# Altium PCB pcb.PcbDoc (part 1 of 2)
Units mil, origin at the board's own origin, x right, y up, seen from the top; angles counter-clockwise.
Board outline 1472.44 x 1500 mil, 2 copper layers (Top Layer, Bottom Layer); 119 components, 90 nets, 409 pads, 148 vias.
Unrouted connection lines stored in the file: 1.
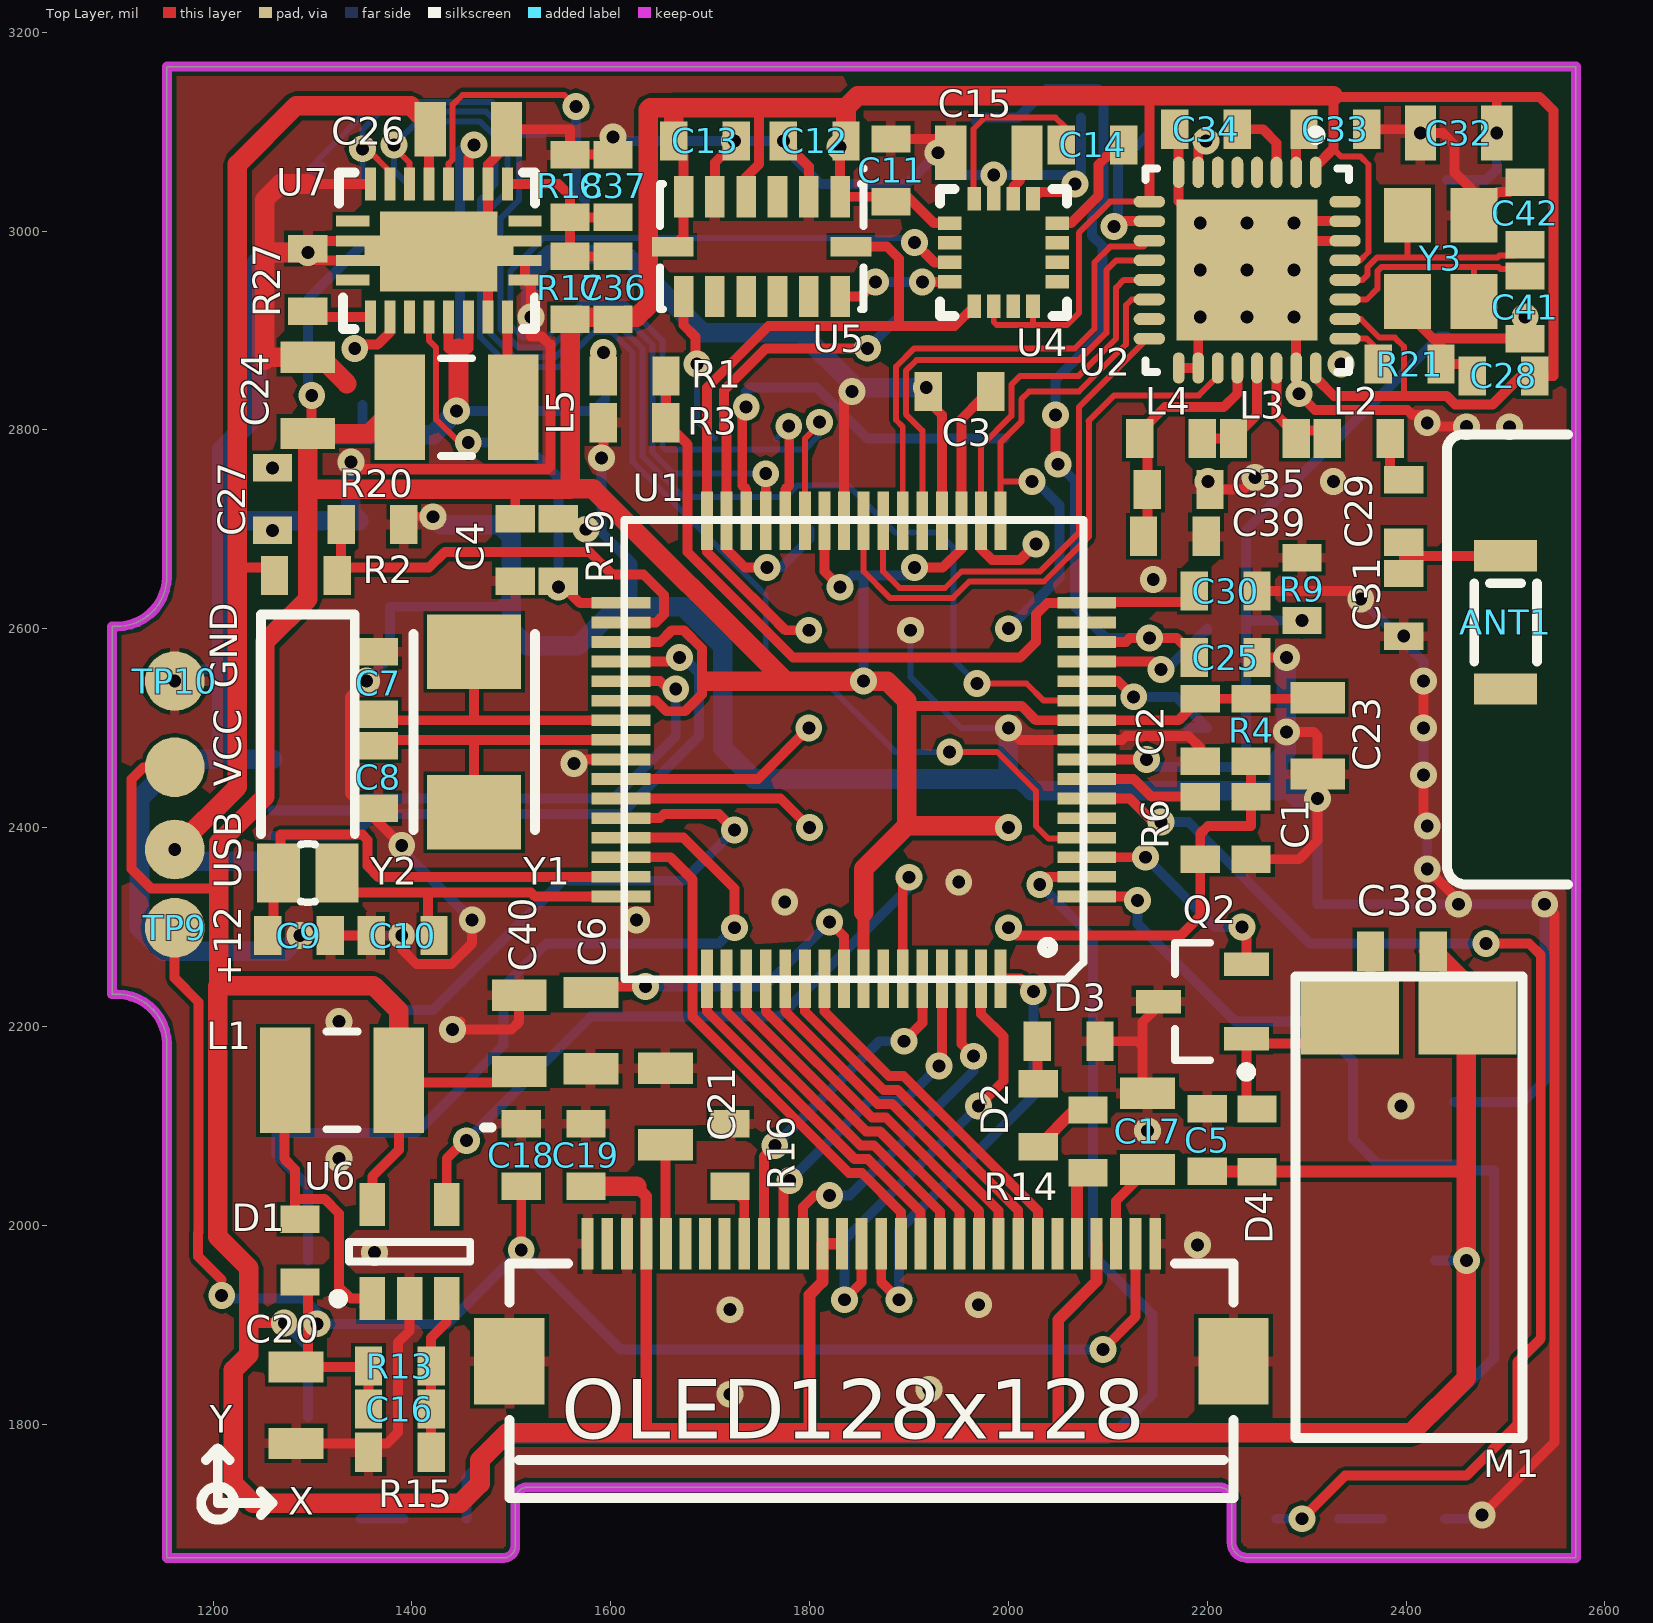
[diagram p0: Top Layer view]
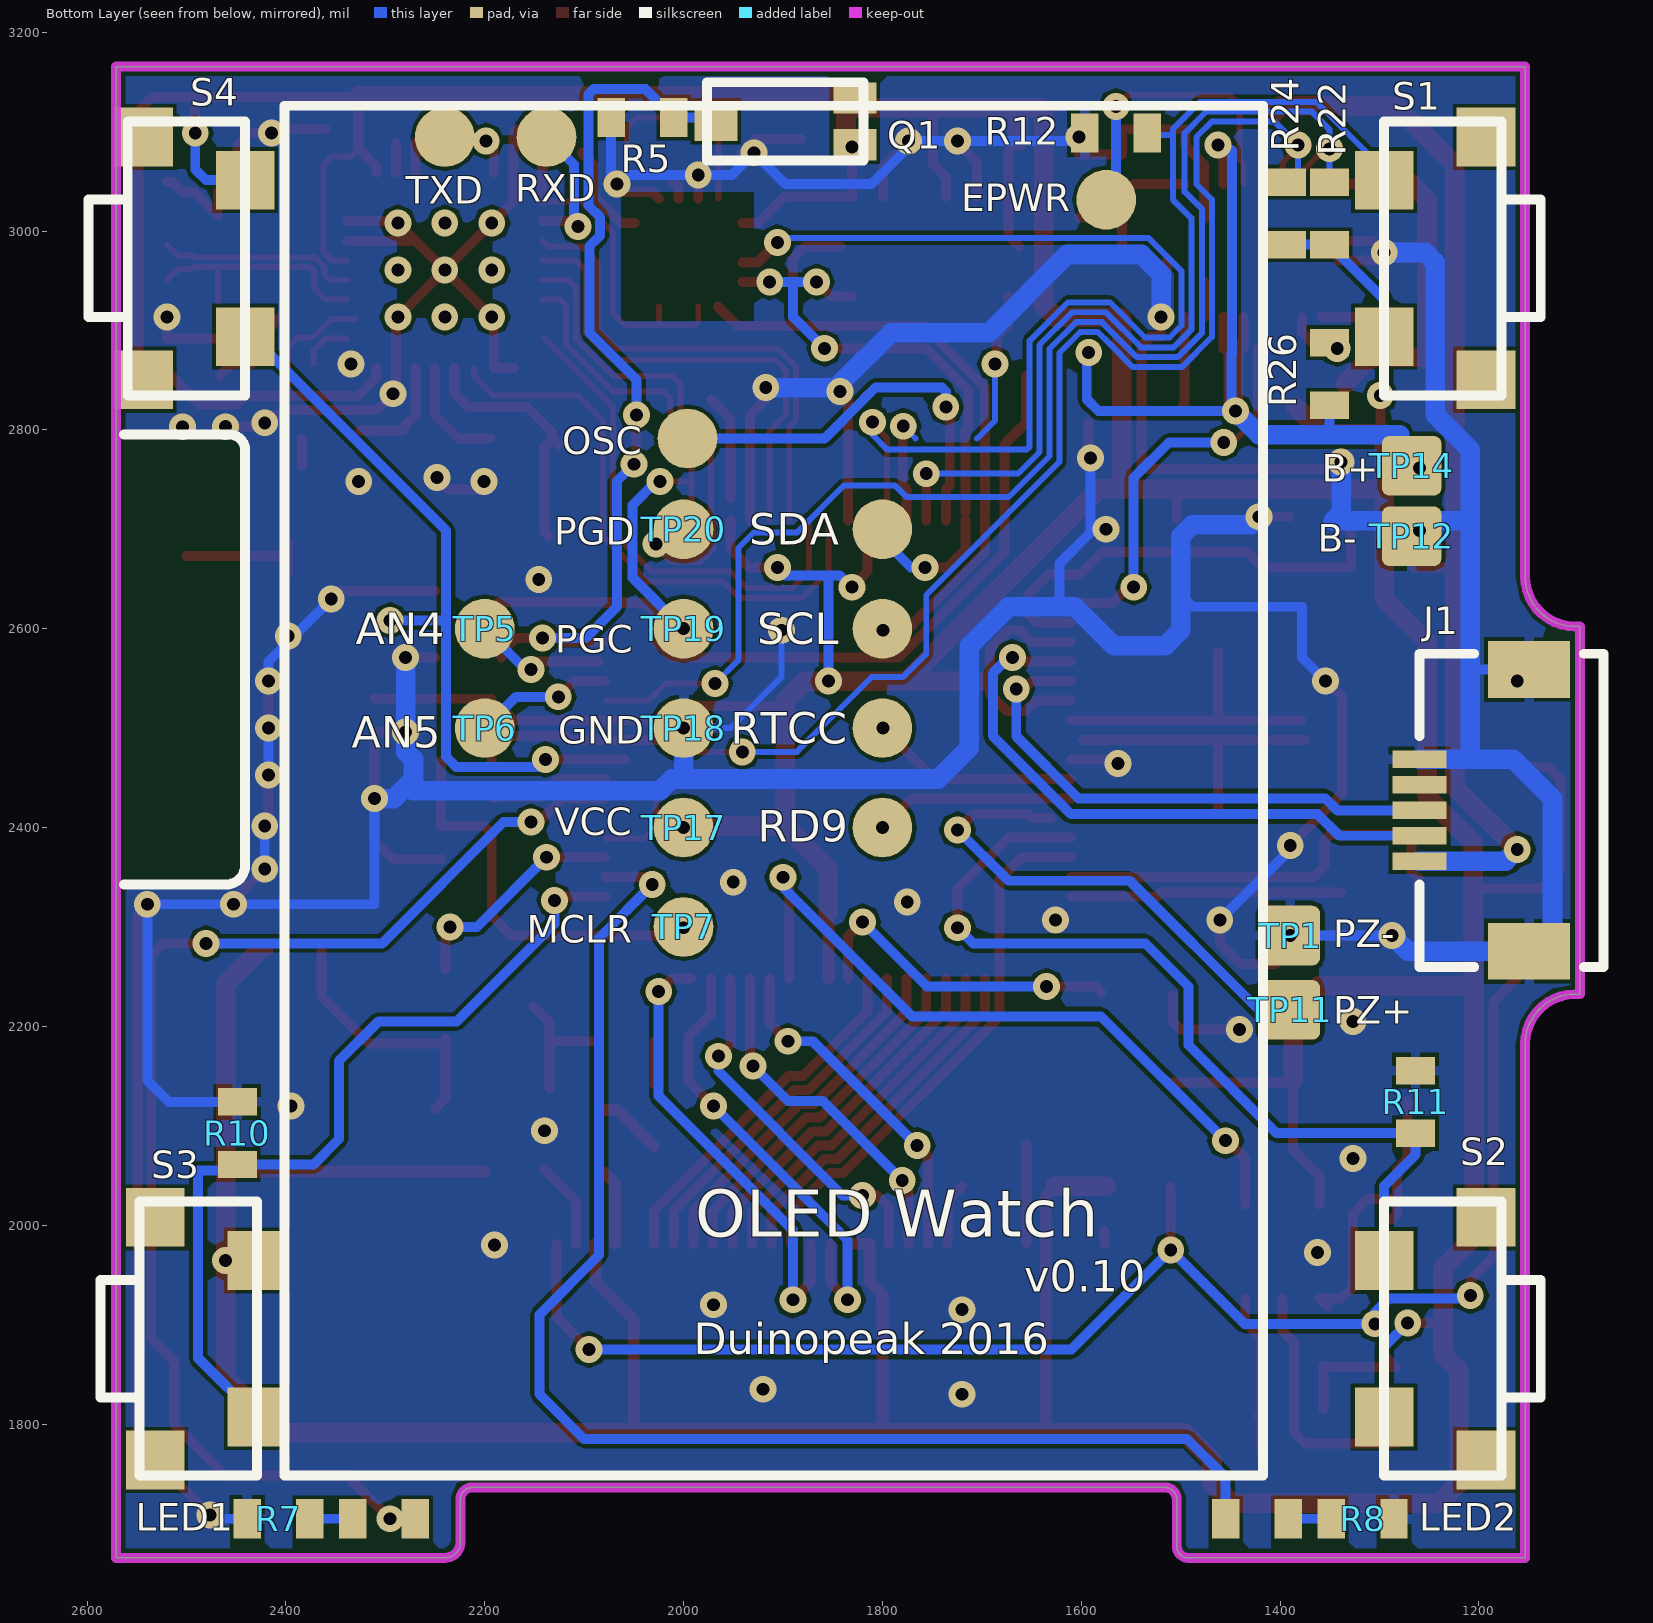
[diagram p1: Bottom Layer view, seen from below]

## Layer stack, top to bottom
Top Layer: signal copper 1.4
Dielectric: dielectric 12.6, FR-4, Dk 4.8
Bottom Layer: signal copper 1.4

## Board outline
2240.16,1665.35 cw(c2240.16,1681.1) 2224.41,1681.1 2224.41,1724.41 ccw(c2212.6,1724.41) 2212.6,1736.22 1515.75,1736.22 ccw(c1515.75,1724.41) 1503.94,1724.41 1503.94,1677.17 cw(c1492.13,1677.17) 1492.13,1665.35 1153.54,1665.35 1153.54,2182.28 ccw(c1103.54,2182.28) 1103.54,2232.28 1098.43,2232.28 1098.43,2602.36 1103.54,2602.36 ccw(c1103.54,2652.36) 1153.54,2652.36 1153.54,3165.35 2570.87,3165.35 2570.87,1665.35

## Design rules (kind name [scope] priority, off if disabled: settings)
Clearance [All] p1: gap=3.94
HoleSize [All] p1: absolutevalues=TRUE maxlimit=100 minlimit=12.99 maxpercent=80.000 minpercent=20.000
MaxMinImpedance [InNet('ANT')] p1: minimum=50.00 maximum=50.00
MinimumAnnularRing [All] p1: minimumring=7
MinimumSolderMaskSliver [All] p1: minsoldermaskwidth=0
NetAntennae ANT_Antennae [InNet('ANT')] p1: netantennaetolerance=3937.01
NetAntennae [All] p2: netantennaetolerance=0
PolygonConnect PolygonConnect_U2 [All vs (ObjectKind = 'Pad') And (Name = 'U2-33')] p1: connectstyle=Direct reliefconductorwidth=10 reliefentries=4 polygonreliefangle="90 Angle" airgapwidth=10
PolygonConnect PolygonConnect_Via [All vs ObjectKind='Via'] p2: connectstyle=Direct reliefconductorwidth=10 reliefentries=4 polygonreliefangle="90 Angle" airgapwidth=10
PolygonConnect [All] p3: connectstyle=Relief reliefconductorwidth=10 reliefentries=4 polygonreliefangle="90 Angle" airgapwidth=10
RoutingVias [All] p1: holewidth=20 width=27.01 viastyle="Through Hole" minholewidth=13 minwidth=27.01 maxholewidth=28 maxwidth=27.01
SilkToSolderMaskClearance SilkscreenOverComponentPads [IsPad] p1: minsilkscreentomaskgap=10 clearancetoexposedcopper=TRUE
SolderMaskExpansion [All] p1: expansion=0.39
Width [All] p1: maxlimit=19.68 minlimit=6 preferedwidth=10
24 further rules are at their usual default settings.

## Classes and differential pairs
component class sensors: 0.7 C11 C12 C13 C14 C15 C25 Q1 R5 U4 U5
component class power: C24 C26 C27 C36 C37 EPWR J1 L5 R17 R18 R19 R22 R24 R26 R27 TP10 TP12 TP14 U7 U8 USB VCC
component class oled: 0.7 C16 C17 C18 C19 C20 C21 C40 D1 D2 D3 L1 OLED128x128 R13 R14 R15 R16 TP9 U6
component class cpu: C1 C2 C3 C4 C5 C6 C7 C8 C9 C10 C23 C30 C38 D4 LED1 LED2 M1 OSC Q2 R1 R2 R3 R4 R6 R7 R8 R9 R10 R11 R12 R20 RD9 RTCC S1 S2 S3 S4 SCL SDA TP1 TP5 TP6 TP7 TP11 TP17 TP18 TP19 TP20 U1 Y1 Y2
component class bluetoothle: ANT1 C28 C29 C31 C32 C33 C34 C35 C39 C41 C42 L2 L3 L4 R21 RXD TXD U2 Y3

## Components (designator, comment, footprint, x,y, rotation, side; value= is the part's Value field where it differs from the comment)
ANT1 "2.4GHz Chip Antenna" 2450AT18A100E 2500,2673.23 r270 top
C1 "Cap" 0603C 2244.09,2425.2 r270 top
C2 "Cap" 0603C 2192.91,2523.62 r270 top
C3 "Cap" 0603C 1976.38,2838.58 r180 top
C4 "Cap" 0603C 1503.94,2704.72 r270 top
C5 "Cap" 0603C 2200,2060 r90 top
C6 "Cap" 0805C 1580,2235 r270 top
C7 "Cap" 0603C 1366.14,2519.68 r90 top
C8 "Cap" 0603C 1366.14,2476.38 r270 top
C9 "Cap" 0603C 1260.83,2291.34 r0 top
C10 "Cap" 0603C 1416.34,2291.34 r180 top
C11 "Cap" 0603C 1881.89,3035.43 r90 top
C12 "Cap" 0603C 1830.71,3090.55 r180 top
C13 "Cap" 0603C 1669.29,3090.55 r0 top
C14 "Cap" 0603C 2059.06,3086.61 r0 top
C15 "Cap Pol1" 0805C 2019.68,3078.74 r180 top
C16 "Cap" 0603C 1362.2,1814.96 r0 top
C17 "Tantalum" 0805C 2140,2055 r90 top
C18 "Cap" 0603C 1510,2045 r90 top
C19 "Cap" 0603C 1575,2045 r90 top
C20 "Cap" 0805C 1283.46,1858.27 r270 top
C21 "Cap" 0805C 1655,2080 r90 top
C23 "Cap" 0805C 2311.02,2531.5 r270 top
C24 "Cap" 0805C 1295.28,2795.28 r90 top
C25 "Cap" 0603C 2192.91,2570.87 r0 top
C26 "Cap" 0805C 1417.32,3102.36 r0 top
C27 "Cap" 0603C 1259.84,2755.91 r270 top
C28 "Cap" 0603C 2472.44,2854.33 r0 top
C29 "Cap" 0603C 2397.64,2744.09 r270 top
C30 "Cap" 0603C 2192.91,2637.8 r0 top
C31 "Cap" 0603C 2397.64,2598.43 r90 top
C32 "Cap" 0805C 2492.13,3098.43 r180 top
C33 "Cap" 0603C 2303.15,3102.36 r0 top
C34 "Cap" 0603C 2224.41,3102.36 r180 top
C35 "Cap" 0603C 2145.67,2740.16 r0 top
C36 "Cap" 0603C 1602.36,2917.32 r90 top
C37 "Cap" 0603C 1602.36,3019.68 r90 top
C38 "Cap" 0603C 2421.26,2275.59 r180 top
C39 "Cap" 0603C 2141.73,2692.91 r0 top
C40 "Cap" 0805C 1507.87,2153.54 r90 top
C41 "Cap" 0603C 2519.68,2897.64 r90 top
C42 "Cap" 0603C 2519.68,2992.13 r90 top
D1 "MBR0520" 0603D 1287.4,2000 r270 top
D2 "1N4148" 0603D 2030,2085 r90 top
D3 "1N4148" 0603D 2035,2185 r0 top
D4 "1N4148" 0603D 2250,2111 r270 top
EPWR "AC" TESTPOINT_TOP#1 1574.8,3031.5 r90 bottom (schematic designator TP3)
J1 "MicroUSB" MICRO_USB 1259.84,2468.5 r180 bottom
L1 "Inductor" INDC3225N 1329.72,2145.67 r180 top
L2 "Inductor" 0603L 2326.77,2791.34 r0 top
L3 "Inductor" 0603L 2232.28,2791.34 r0 top
L4 "Inductor" 0603L 2188.98,2791.34 r180 top
L5 "Inductor" INDC3225N 1444.88,2822.83 r180 top
LED1 "Green" 0603LED 2275.59,1704.72 r0 bottom
LED2 "Blue" 0603LED 1448.82,1704.72 r180 bottom
M1 "Vibration Motor" VIBRATION_MOTOR 2402.75,2258.24 r270 top
OLED128x128 "OLED128x128" OLED128X128 1576.77,1981.3 r0 top
OSC "16MHz" TESTPOINT_TOP#1 1996.06,2791.34 r90 bottom (schematic designator TP2)
Q1 "Photo NPN" TEMT6000 1818.9,3070.87 r0 bottom
Q2 "MOSFET-N" SOT-23B_N 2195,2225 r180 top
R1 "Res3" 0603R 1598.43,2854.33 r0 top
R2 "Res3" 0603R 1318.9,2653.54 r180 top
R3 "Res3" 0603R 1649.61,2807.09 r180 top
R4 "Res3" 0603R 2244.09,2523.62 r270 top
R5 "Res3" 0603R 2015.75,3114.17 r0 bottom
R6 "Res3" 0603R 2192.91,2374.02 r90 top
R7 "Res3" 0603R 2433.07,1704.72 r180 bottom
R8 "Res3" 0603R 1291.34,1704.72 r0 bottom
R9 "Res3" 0603R 2295.28,2614.17 r90 top
R10 "Res3" 0603R 2448.82,2066.93 r90 bottom
R11 "Res3" 0603R 1263.78,2098.43 r90 bottom
R12 "Res3" 0603R 1539.37,3098.43 r0 bottom
R13 "Res3" 0603R 1413.39,1858.27 r180 top
R14 "Res3" 0603R 2080,2110 r270 top
R15 "Res3" 0603R 1362.2,1771.65 r0 top
R16 "Res3" 0603R 1720,2045 r90 top
R17 "Res3" 0603R 1559.06,2917.32 r90 top
R18 "Res3" 0603R 1559.06,3019.69 r90 top
R19 "Res3" 0603R 1547.24,2704.72 r270 top
R20 "Res3" 0603R 1385.83,2704.72 r180 top
R21 "Res3" 0603R 2429.13,2866.14 r180 top
R22 "Res3" 0603R 1350.39,2992.13 r90 bottom
R24 "Res3" 0603R 1393.7,2992.13 r90 bottom
R26 "Res3" 0603R 1350.39,2881.89 r270 bottom
R27 "Res3" 0603R 1295.28,2925.2 r90 top
RD9 "" TESTPOINT_TOP#1 1800,2400 r90 bottom (schematic designator TP2)
RTCC "RTCC" TESTPOINT_TOP#1 1800,2500 r90 bottom (schematic designator TP8)
RXD "AN4" TESTPOINT_TOP#1 2137.8,3094.49 r90 bottom (schematic designator TP4)
S1 "SideButton" SIDE_BUTTON 1295.28,3110.24 r180 bottom
S2 "SideButton" SIDE_BUTTON 1295.28,2023.62 r180 bottom
S3 "SideButton" SIDE_BUTTON 2429.13,1748.03 r0 bottom
S4 "SideButton" SIDE_BUTTON 2440.94,2834.65 r0 bottom
SCL "SCL" TESTPOINT_TOP#1 1800,2600 r90 bottom (schematic designator TP3)
SDA "SDA" TESTPOINT_TOP#1 1800,2700 r90 bottom (schematic designator TP2)
TP1 "PZ-" TESTPOINT_TOP#2 1389.76,2291.33 r180 bottom
TP5 "AN4" TESTPOINT_TOP#1 2200,2600 r90 bottom
TP6 "AN5" TESTPOINT_TOP#1 2200,2500 r90 bottom
TP7 "MCLR" TESTPOINT_TOP#1 2000,2300 r90 bottom
TP9 "+12" TESTPOINT_TOP#1 1161.42,2299.21 r90 top
TP10 "GND" TESTPOINT_TOP#1 1161.42,2547.24 r90 top
TP11 "PZ+" TESTPOINT_TOP#2 1389.76,2216.54 r90 bottom
TP12 "B-" TESTPOINT_TOP#2 1267.72,2692.91 r90 bottom
TP14 "B+" TESTPOINT_TOP#2 1267.72,2763.78 r90 bottom
TP17 "VCC" TESTPOINT_TOP#1 2000,2400 r0 bottom
TP18 "GND" TESTPOINT_TOP#1 2000,2500 r0 bottom
TP19 "PGC" TESTPOINT_TOP#1 2000,2600 r0 bottom
TP20 "PGD" TESTPOINT_TOP#1 2000,2700 r90 bottom
TXD "AN4" TESTPOINT_TOP#1 2240.16,3094.49 r90 bottom (schematic designator TP3)
U1 "PIC24FJ128GB206" TQFP_64_10MM 2125.98,2330.71 r180 top
U2 "nRF8001" QFN50P500X500-32V5N 2240.16,2960.63 r270 top
U4 "HMC5883L" HMC5883L_16PINQFN 1940.94,2948.82 r90 top
U5 "MMA7455LR1" LGA80P500X300-14N 1751.97,2984.25 r270 top
U6 "LM27313XMF" MF05A_N 1397.64,1973.43 r90 top
U7 "BQ25010" RHL 1496.06,3047.24 r180 top
USB "VBUS" TESTPOINT_TOP#1 1161.42,2377.95 r90 top (schematic designator TP8)
VCC "VCC" TESTPOINT_TOP#1 1161.42,2460.63 r90 top (schematic designator TP4)
Y1 "32MHz" ABRACON32MHZ 1464.57,2578.74 r270 top
Y2 "32.768kHz" BCY-W2/D1.5 1295.28,2354.33 r270 top
Y3 "TXC-16MHz" TXC-16MHZ 2468.5,3015.75 r270 top

## Footprints (in the part's own frame and the unit in brackets; to place one, negate y for a bottom-side part, rotate by r counter-clockwise, add the part's x,y. Pads: shape width x height; smd on the part's side, far side on the other; paste and mask are expansions set on the pad)
0603C [mm] "0603 (1608 metric) Capacitor Footprint"
  rect 0.7x1 smd mask+0.01: 1(-0.15,0) 2(1.45,0)
  body extent -0.15,-0.4 1.45,0.4, height 0.8
0603D [mm] "0603 (1608 metric) Diode Footprint"
  rect 0.7x1 smd mask+0.01: 1(-0.15,0) 2(1.45,0)
  body extent -0.12,-0.4 1.43,0.4, height 0.63
0603L [mm] "0603 (1608 metric) Inductor Footprint"
  rect 0.7x1 smd mask+0.01: 1(-0.15,0) 2(1.45,0)
  body extent -0.15,-0.4 1.45,0.4, height 0.8
0603LED [mm] "0603 (1608 metric) LED Footprint"
  rect 0.7x1 smd mask+0.01: 1(-0.15,0) 2(1.45,0)
  body extent -0.12,-0.37 1.43,0.38, height 0.55
0603R [mm] "0603 (1608 metric) Resistor Footprint"
  rect 0.7x1 smd mask+0.01: 1(-0.15,0) 2(1.45,0)
  body extent -0.15,-0.4 1.45,0.4, height 0.45
0805C [mm] "0805 (2012 metric) Capacitor Footprint"
  rect 0.8x1.4 smd mask+0.01: 1(0.025,0) 2(1.975,0)
  body extent 0,-0.63 2,0.63, height 1.1
2450AT18A100E [mm] "2.4GHz Chip Antenna"
  rect 0.8x1.6 smd: 1(0,0) 2(3.4,0)
  silkscreen extent 0.7,-0.8 2.7,0.8, body extent 0.1,-0.8 3.3,0.8, height 1.33
ABRACON32MHZ [mm] "ABRACON 32MHz SMD Crystal"
  rect 1.9x2.4 smd: 1(0.05,-0.05) 2(4.15,-0.05)
  silkscreen extent -0.4,-1.6 4.6,1.5, body extent -0.4,-1.65 4.6,1.55, height 1.3
BCY-W2/D1.5 [mm] "Crystal, Thru-Hole; 2 Leads; Body 1.5 x 5.1 mm (Dia.xH)"
  rect 1.5x1.1 smd: 1(0,0.75) 2(0,-0.75)
  silkscreen extent -0.75,-0.18 0.75,0.18
HMC5883L_16PINQFN [mm]
  rect 0.6x0.35 smd: 1(-0.625,-0.625) 2(-0.625,-1.125) 3(-0.625,-1.625) 4(-0.625,-2.125) 9(2.125,-2.125) 10(2.125,-1.625) 11(2.125,-1.125) 12(2.125,-0.625)
  rect 0.35x0.6 smd: 5(0,-2.75) 6(0.5,-2.75) 7(1,-2.75) 8(1.5,-2.75) 13(1.5,0) 14(1,0) 15(0.5,0) 16(0,0)
  silkscreen extent -0.87,-3 2.37,0.25, body extent -0.75,-2.87 2.25,0.13, height 0.9
INDC3225N [mm] "Chip Inductor, Body 3.2x2.5mm, IPC Medium Density"
  rect 1.3x2.7 smd: 1(-1.45,0) 2(1.45,0)
  silkscreen extent -0.4,-1.25 0.4,1.25, body extent -1.7,-1.35 1.7,1.35, height 1.5
LGA80P500X300-14N [mm] "LGA, 14-Leads, Body 3x5x0.92mm, Pitch 0.8mm, IPC Medium Density"
  rect 1.05x0.5 smd: 1(-1.275,2) 2(-1.275,1.2) 3(-1.275,0.4) 4(-1.275,-0.4) 5(-1.275,-1.2) 6(-1.275,-2) 8(1.275,-2) 9(1.275,-1.2) 10(1.275,-0.4) 11(1.275,0.4) 12(1.275,1.2) 13(1.275,2)
  rect 0.5x1.05 smd: 7(0,-2.275) 14(0,2.275)
  silkscreen extent -2.05,-2.6 1.6,2.65, body extent -1.57,-2.57 1.58,2.58, height 1
MF05A_N [mm] "SOT23, 5-Leads, Body 2.9x1.6mm, Pitch 0.95mm, Lead Span 2.8mm, IPC Medium Density"
  rect 1.1x0.65 smd: 1(-1.2,0.95) 2(-1.2,0) 3(-1.2,-0.95) 4(1.2,-0.95) 5(1.2,0.95)
  silkscreen extent -1.32,-1.55 0.25,1.95, body extent -0.9,-1.55 0.9,1.55, height 1.19
MICRO_USB [mm] "Micro USB Connector"
  rect 1.38x0.45 smd: 1(0,-2.6) 2(0,-1.95) 3(0,-1.3) 4(0,-0.65) 5(0,0)
  rect 2.1x1.45 smd: 5(2.8,-4.9) 5(2.8,2.3)
  silkscreen extent 0,-5.3 4.7,2.7, body extent 0.05,-5.29 5.48,2.69, height 2.69
OLED128X128 [mil]
  rect 12x52 smd: 1(570.87,0) 2(551.18,0) 3(531.5,0) 4(511.81,0) 5(492.13,0) 6(472.44,0) 7(452.76,0) 8(433.07,0) 9(413.39,0) 10(393.7,0) 11(374.02,0) 12(354.33,0) 13(334.65,0) 14(314.96,0) 15(295.28,0) 16(275.59,0) 17(255.91,0) 18(236.22,0) 19(216.54,0) 20(196.85,0) 21(177.17,0) 22(157.48,0) 23(137.8,0) 24(118.11,0) 25(98.43,0) 26(78.74,0) 27(59.05,0) 28(39.37,0) 29(19.68,0) 30(0,0)
  rect 70.87x86.61 smd: 31(-78.74,-118.11) 32(649.61,-118.11)
  silkscreen extent -79,-256 650,-20
QFN50P500X500-32V5N [mm] "QFN, 32-Leads, Body 5x5mm, Pitch 0.5mm, IPC Medium Density"
  oval 0.8x0.3 smd: 1(-2.5,1.75) 2(-2.5,1.25) 3(-2.5,0.75) 4(-2.5,0.25) 5(-2.5,-0.25) 6(-2.5,-0.75) 7(-2.5,-1.25) 8(-2.5,-1.75) 17(2.5,-1.75) 18(2.5,-1.25) 19(2.5,-0.75) 20(2.5,-0.25) 21(2.5,0.25) 22(2.5,0.75) 23(2.5,1.25) 24(2.5,1.75)
  oval 0.3x0.8 smd: 9(-1.75,-2.5) 10(-1.25,-2.5) 11(-0.75,-2.5) 12(-0.25,-2.5) 13(0.25,-2.5) 14(0.75,-2.5) 15(1.25,-2.5) 16(1.75,-2.5) 25(1.75,2.5) 26(1.25,2.5) 27(0.75,2.5) 28(0.25,2.5) 29(-0.25,2.5) 30(-0.75,2.5) 31(-1.25,2.5) 32(-1.75,2.5)
  rect 3.6x3.6 smd: 33(0,0)
  silkscreen extent -3.57,-2.6 2.6,2.6, body extent -2.58,-2.58 2.58,2.58, height 1
RHL [mm]
  rect 0.85x0.28 smd mask+0.07: 0(-0.45,1.95) 0(-0.45,1.45) 0(3.95,1.45) 0(3.95,1.95) 1(-0.45,0.95) 10(3.95,0.95) 11(3.95,2.45) 20(-0.45,2.45)
  rect 0.4x0.78 smd mask+0.07: 0(0.05,1.7) 0(3.45,1.7)
  rect 3x2.05 smd mask+0.07: 0(1.75,1.725)
  rect 0.28x0.85 smd mask+0.07: 2(0,0) 3(0.5,0) 4(1,0) 5(1.5,0) 6(2,0) 7(2.5,0) 8(3,0) 9(3.5,0) 12(3.5,3.4) 13(3,3.4) 14(2.5,3.4) 15(2,3.4) 16(1.5,3.4) 17(1,3.4) 18(0.5,3.4) 19(0,3.4)
  silkscreen extent -0.7,-0.3 4.3,3.7, body extent -0.52,-0.12 4.13,3.53, height 1
SIDE_BUTTON [mm] "SMD Button Side Activated"
  rect 1.5x1.5 smd: 1(0,-1.5) 2(0,-5.5) 3(2.6,-6.6) 3(2.6,-0.4)
  silkscreen extent 0,-7 4,0, body extent 0,-7 4,0, height 3.5
SOT-23B_N [mm] "SOT23, 3-Leads, Body 2.9x1.3mm, Pitch 0.95mm, Lead Span 2.4mm, IPC Medium Density"
  rect 1.15x0.6 smd: 1(-1.125,0.95) 2(-1.125,-0.95) 3(1.125,0)
  silkscreen extent -1.25,-1.5 0.7,1.92, body extent -0.7,-1.5 0.7,1.5, height 1.14
TEMT6000 [mm] "Ambient Light Sensor"
  rect 1.1x0.8 smd: 1(0.225,-0.4) 2(0.225,-1.6)
  rect 1.1x1 smd: 3(3.775,-1)
  silkscreen extent 0,-2 4,0, body extent 0,-2 4,0, height 1.05
TESTPOINT_TOP#1 [mil] "Test Point Pad"
  round 60 smd: 1(0,0)
TESTPOINT_TOP#2 [mil] "Test Point Pad"
  rrect25% 60x60 smd: 1(0,0)
TQFP_64_10MM [mm]
  rect 1.5x0.3 smd: 1(1.2,0) 2(1.2,-0.5) 3(1.2,-1) 4(1.2,-1.5) 5(1.2,-2) 6(1.2,-2.5) 7(1.2,-3) 8(1.2,-3.5) 9(1.2,-4) 10(1.2,-4.5) 11(1.2,-5) 12(1.2,-5.5) 13(1.2,-6) 14(1.2,-6.5) 15(1.2,-7) 16(1.2,-7.5) 33(13.1,-7.5) 34(13.1,-7) 35(13.1,-6.5) 36(13.1,-6) 37(13.1,-5.5) 38(13.1,-5) 39(13.1,-4.5) 40(13.1,-4) 41(13.1,-3.5) 42(13.1,-3) 43(13.1,-2.5) 44(13.1,-2) 45(13.1,-1.5) 46(13.1,-1) 47(13.1,-0.5) 48(13.1,0)
  rect 0.3x1.5 smd: 17(3.4,-9.6) 18(3.9,-9.6) 19(4.4,-9.6) 20(4.9,-9.6) 21(5.4,-9.6) 22(5.9,-9.6) 23(6.4,-9.6) 24(6.9,-9.6) 25(7.4,-9.6) 26(7.9,-9.6) 27(8.4,-9.6) 28(8.9,-9.6) 29(9.4,-9.6) 30(9.9,-9.6) 31(10.4,-9.6) 32(10.9,-9.6) 49(10.9,2.1) 50(10.4,2.1) 51(9.9,2.1) 52(9.4,2.1) 53(8.9,2.1) 54(8.4,2.1) 55(7.9,2.1) 56(7.4,2.1) 57(6.9,2.1) 58(6.4,2.1) 59(5.9,2.1) 60(5.4,2.1) 61(4.9,2.1) 62(4.4,2.1) 63(3.9,2.1) 64(3.4,2.1)
  silkscreen extent 1.28,-9.61 13.01,2.12, body extent 2.5,-8.5 12,1, height 2
TXC-16MHZ [mm]
  rect 1.4x1.2 smd: 1(0,-1.7) 2(2.2,-1.7) 3(2.2,0) 4(0,0)
  body extent -0.6,-2.2 2.8,0.5, height 0.7
VIBRATION_MOTOR [mm]
  rect 2x2.5 smd: 1(1.2,1.5) 2(1.2,-1.5)
  silkscreen extent 0.2,-2.9 12,2.9, body extent 0.6,-2.5 11.5,2.5, height 5

## Part data
ANT1: library part 2450AT18A100E
C1 C2 C3 C4 C5 C6 C7 C8 C9 C10 C11 C12 C13 C14 C16 C18 C19 C20 C21 C23 C24 C25 C26 C27 C28 C29 C30 C31 C32 C33 C34 C35 C36 C37 C38 C39 C40 C41 C42: "Capacitor"
C15: "Polarized Capacitor (Radial)"
C17: library part "Cap Pol1", "Polarized Capacitor (Radial)"
D1: library part "D Schottky", "Schottky Diode"
D2 D3 D4: library part Diode, "Default Diode"
EPWR OSC RD9 RTCC RXD SCL SDA TP1 TP5 TP6 TP7 TP9 TP10 TP11 TP12 TP14 TP17 TP18 TP19 TP20 TXD USB VCC: library part TestPoint, "Test Point"
LED1 LED2: library part LED2, "Typical RED, GREEN, YELLOW, AMBER GaAs LED"
M1: library part VibrationMotor
Q1: "NPN Phototransistor"
Q2: "N-Channel MOSFET"
R1 R2 R3 R4 R5 R6 R7 R8 R9 R10 R11 R12 R13 R14 R15 R16 R17 R18 R19 R20 R21 R22 R24 R26 R27: "Resistor"
U4: "Honeywell 3 Axis Magnetometer"
U5: "3-Axis Accelerometer, 5g"
U6: "1.6 MHz Boost Converter With 30V Internal FET Switch in SOT-23"
Y1 Y2: library part XTAL, "Crystal Oscillator"
Y3: library part CrystalTXC

## Via types
v1: diameter 27.01, hole 13, Top Layer to Bottom Layer, tented both sides, 139 vias
v2: diameter 27.01, hole 12.99, Top Layer to Bottom Layer, tented both sides, 9 vias

## Nets (pads, with @x,y where several pads share a name; then routed paths per layer and width w, separated by ;. In a path a pad name is that pad's centre, name@x,y a point inside that pad or via, vN(x,y) a via of type N, cw(c..) or ccw(c..) an arc to the next point about the centre after c; other vN are vias at no path point)
+12: C16.1 C18.1 C20.1 D1.2 OLED128x128.2 R13.2 TP9.1 | length 1744.5
  Top Layer w10: TP9.1@1161.42,2299.21 1161.42,2248.48 1185.49,2224.41 1185.49,1992.58 1185.04,1992.13 1185.04,1968.5 1208.66,1944.88 ; D1.2@1287.4,1942.91 1295.28,1935.03 1295.28,1869.09 C20.1@1283.46,1857.28 1355.31,1857.28 R13.2@1356.3,1858.27 C16.1@1356.3,1814.96 ; v1(1510,1975) C18.1@1510,2039.1 ; v1(2095,1875) 2127.95,1907.95 OLED128x128.2@2127.95,1981.3
  Bottom Layer w10: v1@1208.66,1926.1 1290.88,1926.1 1304.39,1912.6 v1(1304.39,1900.81) 1435.81,1900.81 v1(1510,1975) 1610,1875 v1(2095,1875)
  other v1: 1208.66,1929.13
AN3: TP5.1 U1.13 | length 137.3
  Top Layer w10: U1.13@2085.28,2566.93 2145.67,2566.93 v1(2153.54,2559.06)
  Bottom Layer w10: v1(2153.54,2559.06) 2159.06,2559.06 TP5.1@2200,2600 TP5.1@2200,2597.64
AN4: TP6.1 U1.12 | length 159.7
  Top Layer w10: U1.12@2078.74,2547.24 2110.24,2547.24 v1(2125.98,2531.5)
  Bottom Layer w10: v1(2125.98,2531.5) 2168.5,2531.5 TP6.1@2200,2500 TP6.1@2181.1,2500
AN_LIGHT: C25.1 Q1.3 R5.1 U1.14 | length 905.5
  Top Layer w10: v1(2050,2765.42) 2047.24,2768.17 v1(2047.24,2814.96) v1@2050,2812.2 ; U1.14@2078.74,2586.61 2118.11,2586.61 2122.04,2590.55 v1(2141.73,2590.55) 2169.3,2590.55 2183.08,2576.77 C25.1@2183.08,2570.87
  Bottom Layer w10: Q1.3@1967.52,3110.24 1971.45,3114.17 R5.1@2009.85,3114.17 2038.47,3142.79 2090.32,3142.79 2095.55,3137.56 2095.55,3025.68 2083.86,3013.99 2083.86,2995.4 2094.49,2984.77 2094.49,2897.64 2047.24,2850.39 v1(2047.24,2814.96) ; v1(2050,2765.42) 2066.93,2748.49 2066.93,2622.05 2098.43,2590.55 v1(2141.73,2590.55)
AN_TEMP: U1.15
ANT: ANT1.1 C29.2 C31.2 | length 134.7
  Top Layer w10: C31.2@2397.63,2655.52 2397.64,2671.26 ; C29.2@2397.64,2687 2397.64,2671.26 ; ANT1.1@2500,2673.23 2399.61,2673.23 2397.64,2671.26
ANT1: L3.1 L4.1 U2.21 | length 112.2
  Top Layer w10: L4.1@2194.88,2791.34 L3.1@2226.38,2791.34 2250,2814.96 U2.21@2250,2862.2
ANT2: L2.1 L3.2 U2.22 | length 107.3
  Top Layer w10: U2.22@2269.68,2862.2 2269.68,2814.96 L3.2@2281.5,2803.15 ; L3.2@2281.5,2799.21 L2.1@2324.8,2799.21
BT_IREF: R21.2 U2.25 | length 52.1
  Top Layer w6: U2.25@2338.58,2891.73 2360.24,2891.73 2372.04,2879.92 R21.2@2372.04,2866.14
BT_RDYN: U1.23 U2.16 | length 501.8
  Top Layer w6: U1.23@1874.02,2708.66 1874.02,2657.48 1890.53,2640.97 1936.25,2640.97 1952.76,2657.48 1952.88,2657.35 2031.61,2657.35 2070.87,2696.61 2070.87,2804.84 2070.77,2804.94 2070.77,2813.17 2070.87,2813.27 2070.87,2822.83 U2.16@2139.76,2891.73
BT_REQN: U1.21 U2.12 | length 485.4
  Top Layer w6: U1.21@1913.39,2708.66 1913.39,2799.21 1896.88,2815.72 1896.88,2859.45 1907.51,2870.08 2070.87,2870.08 2098.43,2897.64 2098.43,2960.63 2108.27,2970.47 U2.12@2141.73,2970.47
BTN1: R12.1 S1.1 U1.29 | length 984
  Top Layer w10: U1.29@1755.91,2708.66 v1(1755.9,2755.9)
  Bottom Layer w6: S1.1@1295.28,3051.18 1295.28,3061.3 1363.9,3129.92 1480.31,3129.92 1507.87,3102.36 1507.87,3096.38 ; R12.1@1533.47,3098.42 1531.43,3096.38 1507.87,3096.38 ; v1(1755.9,2755.9) 1663.66,2755.9 1641.92,2777.64 1641.92,2885.57 1609.22,2918.27 1575.2,2918.27 1539.94,2883.01 1507.1,2883.01 1489.31,2900.8 1489.31,3012.93 1507.87,3031.5 1507.87,3096.38
  Bottom Layer w10: S1.1@1295.28,3051.18 S1.1@1309.05,3064.96
BTN2: R11.1 S2.1 U1.45 | length 896.6
  Top Layer w10: U1.45@1610.24,2389.76 1673.23,2389.76 1724.41,2338.58 v1(1724.41,2299.21)
  Bottom Layer w10: S2.1@1295.28,1964.57 1295.28,2039.37 1263.78,2070.86 R11.1@1263.78,2092.52 1403.55,2092.52 1492.13,2181.1 1492.13,2240.16 1535.43,2283.46 1708.66,2283.46 v1(1724.41,2299.21)
BTN3: R10.1 S3.1 U1.1 | length 850.5
  Top Layer w10: U1.1@2078.74,2330.71 v1@2125.98,2330.71
  Bottom Layer w10: v1(2129.92,2326.77) 2129.92,2303.15 2228.35,2204.72 2307.09,2204.72 2346.46,2165.35 2346.46,2086.61 2372.04,2061.03 R10.1@2448.82,2061.03 2454.73,2055.12 2488.19,2055.12 2488.19,1866.14 S3.1@2429.13,1807.09
BTN4: R9.1 S4.1 U1.8 | length 741.8
  Top Layer w10: U1.8@2059.06,2468.5 U1.8@2078.74,2468.5 v1@2125.98,2468.5
  Bottom Layer w10: v1(2138.92,2468.5) 2146.36,2461.06 2228.78,2461.06 2238.94,2471.22 2238.94,2606.3 ; v1(2295.27,2608.27) 2240.91,2608.27 2238.94,2606.3 ; S4.1@2440.94,2893.7 2433.7,2893.7 2238.94,2698.94 2238.94,2606.3
D+: J1.3 U1.37 | length 542.3
  Top Layer w10: U1.37@1610.24,2547.24 1649.6,2547.24 v1@1657.48,2539.36
  Bottom Layer w10: J1.3@1259.84,2417.32 1342.52,2417.32 1354.33,2429.13 1602.6,2429.13 1665.35,2491.89 v1(1665.35,2539.37) v1@1657.48,2539.36
D-: J1.2 U1.36 | length 625.5
  Top Layer w10: U1.36@1610.24,2566.93 1657.48,2566.93 v1@1661.41,2570.86
  Bottom Layer w10: J1.2@1259.84,2391.73 1340.55,2391.73 1362.2,2413.39 1610.24,2413.39 1688.98,2492.13 1688.98,2555.12 1667.32,2576.77 v1@1661.42,2570.86
  other v1: 1669.29,2570.87
DEC1: C33.1 U2.2 | length 29.5
  Top Layer w10: U2.2@2289.37,3059.05 C33.1@2289.37,3088.58
DEC2: C34.1 U2.3 | length 74.6
  Top Layer w10: C34.1@2230.31,3102.36 2255.91,3102.36 2269.68,3088.58 U2.3@2269.68,3059.05
FB: C16.2 R13.1 R15.2 U6.3 | length 162.7
  Top Layer w10: C16.2@1417.32,1808.07 1419.29,1806.1 R15.2@1419.29,1771.66 ; C16.2@1421.26,1808.07 1419.29,1810.04 1419.29,1886.81 1435.04,1902.56 U6.3@1435.04,1926.18